# Altium PCB PCB_6050_2022-06-14.pcbdoc
Units mil, origin at the board's own origin, x right, y up, seen from the top; angles counter-clockwise.
Board outline 1180.29 x 1050.29 mil, 2 copper layers (Top Layer, Bottom Layer); 34 components, 23 nets, 128 pads, 23 vias.
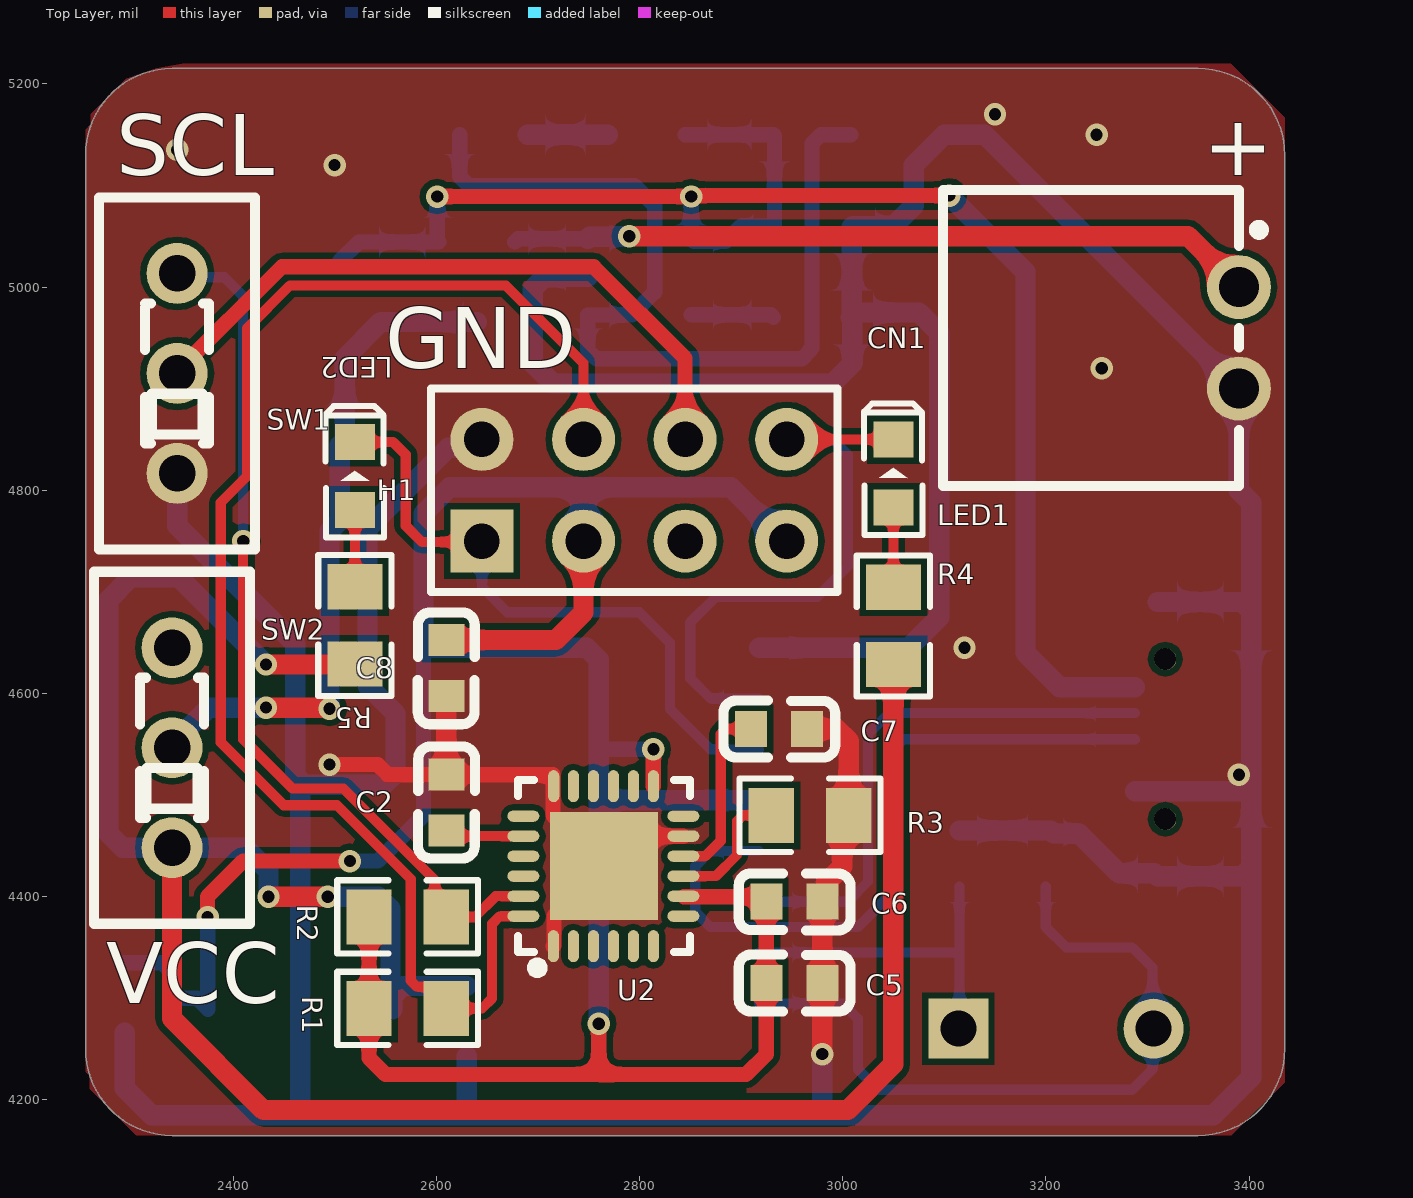
[diagram p0: Top Layer view]
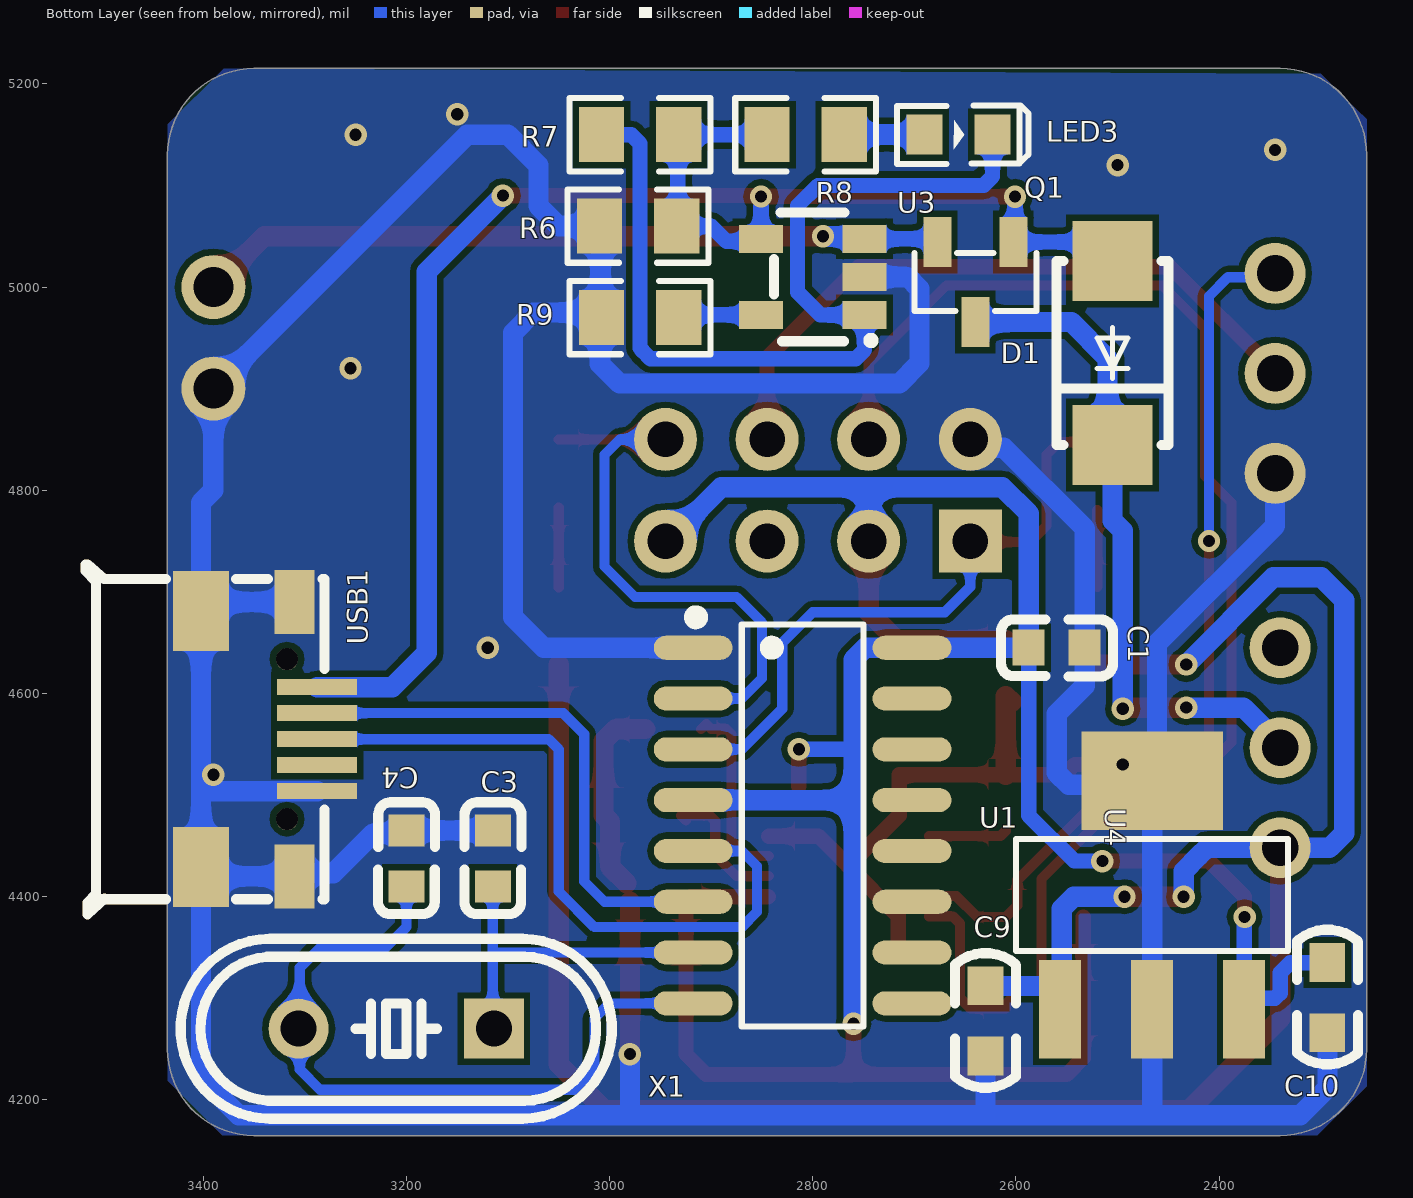
[diagram p1: Bottom Layer view, seen from below]

## Layer stack, top to bottom
Top Solder: solder mask 0.4, Solder Resist, Dk 3.5
Top Layer: signal copper 1.4
Dielectric1: dielectric 12.6, FR-4, Dk 4.8
Bottom Layer: signal copper 1.4
Bottom Solder: solder mask 0.4, Solder Resist, Dk 3.5

## Board outline
2340,4164.85 cw(c2340,4250) 2254.85,4250 2254.85,5130 cw(c2340,5130) 2340,5215.15 3350,5215.15 cw(c3350,5130) 3435.15,5130 3435.15,4250 cw(c3350,4250) 3350,4164.85

## Design rules (kind name [scope] priority, off if disabled: settings)
Clearance [All] p1: gap=6 ignorepadtopadclearanceinfootprint=FALSE
PolygonConnect [All] p1: connectstyle=Direct reliefconductorwidth=10 reliefentries=4 polygonreliefangle="90 Angle" airgapwidth=10
RoutingVias [All] p1: holewidth=12 width=22 viastyle="Through Hole" minholewidth=12 minwidth=22 maxholewidth=12 maxwidth=22
SolderMaskExpansion [All] p1: expansion=4 istentingtop=FALSE
Width [All] p1: maxlimit=50 minlimit=10 preferedwidth=10
30 further rules are at their usual default settings.

## Components (designator, comment, footprint, x,y, rotation, side; value= is the part's Value field where it differs from the comment)
C1 "0.1u" C0603#1 2560,4645 r0 bottom
C2 "10uf" C0603#1 2610,4492.44 r270 top
C3 "22pf" C0603#1 3115,4437.56 r270 bottom
C4 "22pf" C0603#1 3200,4437.56 r270 bottom
C5 "10uf" C0603#1 2952.45,4315 r180 top
C6 "0.1uf" C0603#1 2952.45,4395 r180 top
C7 "0.1uf" C0603#1 2937.45,4565 r180 top
C8 "0.1u" C0603#1 2610,4625 r90 top
C9 "1uf" C0603#2 2629.99,4243.15 r90 bottom
C10 "1uf" C0603#2 2293.47,4266.24 r90 bottom
CN1 "XH-2AW_C2908611" CONN-TH_XH-2AW_C2908611 3390,4950 r270 top
D1 "1N5819(SS14)" DO-214AC_L4.3-W2.7-LS5.3-RD 2505,4935 r90 bottom
H1 "HDR-F-2.54_2x4" HDR-F-2.54_2X4 2795,4800 r0 top
LED1 "LED-0603_R" LED0603_RED 3050,4816.54 r90 top
LED2 "LED-0603_R" LED0603_RED 2520,4813.92 r90 top
LED3 "LED-0603_R" LED0603_RED 2656.53,5150 r180 bottom
Q1 "SI2301DS" SOT-23-3_L2.9-W1.3-P1.90-LS2.4-BR 2640,5005 r90 bottom
R1 "4.7k" R0805 2571.96,4290 r180 top
R2 "4.7k" R0805 2571.96,4380 r180 top
R3 "10k" R0805 2967.93,4480 r180 top
R4 "2k" R0805 3050,4666.54 r270 top
R5 "2k" R0805 2520,4666.96 r270 top
R6 "10k" R0805 2971.96,5060 r0 bottom
R7 "10k" R0805 2970,5150 r180 bottom
R8 "1k" R0805 2806.96,5150 r0 bottom
R9 "1.5k" R0805 2970,4970 r180 bottom
SW1 "拨动开关" SW-TH_SS-12D01-GX 2345,4915 r90 top
SW2 "拨动开关" SW-TH_SS-12D01-GX 2340,4546.58 r90 top
U1 "CH340G" SOIC-16_L9.9-W3.9-P1.27-LS6.0-BL 2810,4470 r270 bottom
U2 "MPU-6050_C24112  六轴陀螺仪" QFN-24_L4.0-W4.0-P0.50-BL-EP2.7 2764.51,4430 r0 top
U3 "LTC4054XES5-4.2#TRPBF" TSOT-23-5_L2.9-W1.6-P0.95-LS2.8-BR 2800,5010 r180 bottom
U4 "TC1262-3.3" tc1262 2450,4385 r270 bottom
USB1 "MICROQTJ usb接口" MICRO-USB-SMD_MICROQTJ 3345,4555 r270 bottom
X1 "12MHZ" HC-49US_L11.5-W4.5-P4.88 3210,4270 r0 bottom

## Footprints (in the part's own frame and the unit in brackets; to place one, negate y for a bottom-side part, rotate by r counter-clockwise, add the part's x,y. Pads: shape width x height; smd on the part's side, far side on the other; paste and mask are expansions set on the pad)
C0603#1 [mm]
  rect 0.8x0.9 smd: 1(-0.7,0) 2(0.7,0)
  silkscreen extent -1.41,-0.71 1.39,0.72
C0603#2 [mm]
  rect 0.965x0.889 smd: 1(0,0) 2(1.753,0)
  silkscreen extent -0.79,-0.76 2.57,0.76, body extent 0.1,-0.4 1.7,0.4, height 0.3
CONN-TH_XH-2AW_C2908611 [mm]
  round 1.6 hole 1: 1(-1.27,0) 2(1.27,0)
  silkscreen extent -3.7,-7.4 3.7,0.6
DO-214AC_L4.3-W2.7-LS5.3-RD [mm]
  rect 2x2 smd: 1(-2.3,0) 2(2.3,0)
  silkscreen extent -2.3,-1.4 2.3,1.4
HC-49US_L11.5-W4.5-P4.88 [mm]
  rect 1.5x1.5 hole 0.9: 1(-2.44,0)
  round 1.5 hole 0.9: 2(2.44,0)
  silkscreen extent -5.39,-2.25 5.39,2.25
HDR-F-2.54_2X4 [mil]
  rect 62x62 hole 35: 1(-150,-50)
  round 62 hole 35: 2(-150,50) 3(-50,-50) 4(-50,50) 5(50,-50) 6(50,50) 7(150,-50) 8(150,50)
  silkscreen extent -200,-100 200,100
LED0603_RED [mm]
  rect 0.9x1 smd: 1(-0.85,0) 2(0.85,0)
  silkscreen extent -1.54,-0.73 1.75,0.73
MICRO-USB-SMD_MICROQTJ [mm]
  rect 0.4x2 smd: 1(-1.3,1.452) 2(-0.65,1.452) 3(0,1.452) 4(0.65,1.452) 5(1.3,1.452)
  rect 1.6x1 smd: 6(-3.429,0.889) 9(3.429,0.889)
  rect 2x1.4 smd: 7(-3.2,-1.452) 8(3.2,-1.452)
  round 0.55 hole 0.55 unplated: ""(-2,0.698) ""(2,0.698)
  silkscreen extent -4.37,-4.34 4.38,1.63
QFN-24_L4.0-W4.0-P0.50-BL-EP2.7 [mm]
  oval 0.28x0.8 smd: 1(-1.25,-2) 2(-0.75,-2) 3(-0.25,-2) 4(0.25,-2) 5(0.75,-2) 6(1.25,-2) 13(1.25,2) 14(0.75,2) 15(0.25,2) 16(-0.25,2) 17(-0.75,2) 18(-1.242,2)
  oval 0.8x0.28 smd: 7(2,-1.25) 8(2,-0.75) 9(2,-0.25) 10(2,0.25) 11(2,0.75) 12(2,1.25) 19(-2,1.25) 20(-2,0.75) 21(-2,0.25) 22(-2,-0.25) 23(-2,-0.75) 24(-2,-1.25)
  rect 2.7x2.7 smd: 25(0.012,0)
  silkscreen extent -2.14,-2.79 2.16,2.15
R0805 [mil]
  rect 44.59x54.21 smd: 1(-38.04,0) 2(38.04,0)
  silkscreen extent -69,-36 69,36
SOIC-16_L9.9-W3.9-P1.27-LS6.0-BL [mil]
  oval 23.7x77.6 smd: 1(-175,-107.7) 2(-125,-107.7) 3(-75,-107.7) 4(-25,-107.7) 5(25,-107.7) 6(75,-107.7) 7(125,-107.7) 8(175,-107.7) 9(175,107.7) 10(125,107.7) 11(75,107.7) 12(25,107.7) 13(-25,107.7) 14(-75,107.7) 15(-125,107.7) 16(-175,107.7)
  silkscreen extent -211,-111 198,60
SOT-23-3_L2.9-W1.3-P1.90-LS2.4-BR [mm]
  rect 1.25x0.7 smd: 1(1,-0.95) 2(1,0.95) 3(-1,0)
  silkscreen extent -0.73,-1.53 0.73,1.53
SW-TH_SS-12D01-GX [mil]
  round 60 hole 36: 1(-98.43,0) 2(-0.01,0) 3(98.42,0)
  silkscreen extent -173,-77 173,77
tc1262 [mm]
  rect 2.465x1.05 smd: 1(2.436,-2.707) 2(2.436,-0.407) 3(2.436,1.893)
  rect 2.465x3.54 smd: 4(-3.279,-0.407)
  silkscreen extent -1.82,-3.81 0.97,2.99
TSOT-23-5_L2.9-W1.6-P0.95-LS2.8-BR [mm]
  rect 1.1x0.7 smd: 1(1.294,-0.951) 2(1.294,-0.001) 3(1.294,0.951) 4(-1.294,0.951) 5(-1.294,-0.949)
  silkscreen extent -0.97,-1.65 1.52,1.61

## Part data
C9 C10: library part 22uf
U4: library part TC1262-3.3VDBTR

## Via types
v1: diameter 22, hole 12, Top Layer to Bottom Layer, tented both sides, 23 vias

## Nets (pads, with @x,y where several pads share a name; then routed paths per layer and width w, separated by ;. In a path a pad name is that pad's centre, name@x,y a point inside that pad or via, vN(x,y) a via of type N, cw(c..) or ccw(c..) an arc to the next point about the centre after c; other vN are vias at no path point)
GND: C1.1 C2.1 C3.1 C4.1 C5.1 C6.1 C7.1 C8.1 C9.1 C10.1 CN1.2 H1.2 R3.1 R6.2 R9.1 SW1.1 U1.1 U2.1 U2.11 U2.18 U2.25 U3.2 U4.2 U4.4 USB1.5 USB1.6 USB1.7 USB1.8 USB1.9 | length 6366
  Top Layer w15: v1(2495,4530) 2542.39,4530 2552.39,4520 C2.1 2715,4520 U2.18@2715,4509.36 ; U2.18@2715.02,4508.14 2715.02,4479.98 U2.25 ; U2.1 2715.98,4351.92 2715.98,4380.98 U2.25 ; U2.11 2794.54,4459.54 U2.25
  Top Layer w20: SW1.1@2340,4811.57 SW1.1 ; C8.1@2604.25,4591.7 C8.1 C2.1 ; C7.1 2994.26,4565 3005.97,4553.28 R3.1 2999.61,4473.64 2999.61,4429.61 2983.34,4413.34 ; v1(2980,4245) C5.1 C6.1
  Bottom Layer w20: C10.1 2293.47,4211.53 2320,4185 2465,4185 ; SW1.1 2345,4765 2461.28,4648.72 2461.28,4518.85 U4.4 ; C9.1 2629.99,4185.01 ; H1.2 2636.96,4841.96 2611.96,4841.96 2532.45,4762.44 C1.1 2532.45,4607.56 2560,4580 2560,4521.72 2548.28,4510 2470.13,4510 U4.4 ; U3.2 2706.72,5009.96 2695,4998.25 2695,4925 2715,4905 2990,4905 3009.61,4924.61 3009.61,4968.43 R9.1 R9.1@3009.02,4970.98 ; U1.1 3065,4645 3095,4675 3095,4955 3075,4975 3013.04,4975 R9.1@3009.02,4970.98 ; v1(2980,4245) 2980,4185 ; C3.1 3204.72,4465.11 3207.72,4462.11 3232.89,4462.11 3272.03,4422.97 3307.03,4422.97 USB1.9 3393.16,4420 USB1.8 ; USB1.5 3400.97,4503.8 3402.18,4505 ; USB1.6 3393.16,4690 USB1.7 ; 2465,4185 2630,4185 ; 2465,4185 2466.04,4186.04 U4.2 U4.4 ; 2630,4185 2980,4185 ; 2980,4185 3365,4185 3402.18,4222.18 USB1.8 ; R9.1@3009.02,4970.98 3009.02,5059.02 R6.2 3050,5060 3070,5080 3070,5120 3100,5150 3140,5150 3149.97,5140.03 CN1.2 3390,4800 3402.18,4787.82 USB1.7 ; USB1.8 3402.18,4505 ; 3402.18,4505 USB1.7
  other v1: 3390,4520 3120,4645 3255,4920 2500,5120 2345,5135 3250,5150 3150,5170
MOS_VCC: D1.1 Q1.3 SW2.2 | length 669.8
  Top Layer w20: v1(2432.43,4586.04) 2493.96,4586.04 v1(2495,4585)
  Bottom Layer w20: SW2.2 2340,4550 2376.04,4586.04 v1(2432.43,4586.04) ; v1(2495,4585) 2495,4760 2505,4770 D1.1 2510,4849.45 2510,4930 2545.63,4965.63 Q1.3
NetC2_2: C2.2 U2.20 | length 78
  Top Layer w10: C2.2 2615.35,4459.54 U2.20
NetC3_2: C3.2 U1.7 X1.1 | length 339.6
  Bottom Layer w10: U1.7 3110.53,4345 3115,4340.53 ; X1.1 3115,4271.06 3115,4340.53 ; C3.2 3115,4340.53
NetC4_2: C4.2 U1.8 X1.2 | length 722.5
  Bottom Layer w10: U1.8 3000,4295 3015,4280 3015,4230 3035,4210 3285,4210 3305,4230 3305,4268.94 X1.2 3305,4271.06 3305,4330 3285,4350 3220,4350 3200,4370 C4.2
NetC7_2: C7.2 U2.10 | length 184.1
  Top Layer w10: U2.10 2864.85,4439.85 2880,4455 2880,4560 2885,4565 2899.89,4565 2904.89,4570 C7.2
NetCN1_1: CN1.1 Q1.2 U3.3 | length 735.6
  Top Layer w20: v1(2790,5050) 3340,5050 CN1.1
  Bottom Layer w15: Q1.2 2680.47,5047.44 U3.3
  Bottom Layer w20: U3.3 2751.24,5049.62 2789.62,5049.62 v1(2790,5050)
NetH1_1: H1.1 LED2.2 U1.3 | length 629.1
  Top Layer w10: LED2.2 2557.62,4847.38 2570,4835 2570,4765 2585.86,4749.14 2644.14,4749.14 H1.1
  Bottom Layer w10: H1.1 2645,4705 2670,4680 2800,4680 2830,4650 2830,4585 2870,4545 U1.3
NetH1_4: H1.4 R1.1 U2.24 | length 1421.3
  Top Layer w10: U2.24 2685.57,4380.6 2662.23,4380.6 2655,4373.37 2655,4300 2645,4290 R1.1 2610,4294.18 2592.71,4311.47 2580.86,4311.47 2575,4317.33 2575,4417.37 2502.37,4490 2450,4490 2388,4552 2388,4788 2414,4814 2414,4959.54 2455.96,5001.5 2668.5,5001.5 2745,4925 H1.4
NetH1_6: H1.6 SW1.2 | length 661.8
  Top Layer w15: SW1.2 2345,4916.7 2448.3,5020 2755,5020 2845,4930 H1.6
NetH1_8: H1.8 LED1.2 U1.2 | length 590
  Top Layer w10: H1.8 LED1.2
  Bottom Layer w10: U1.2 2870,4595 2850,4615 2850,4670 2875,4695 2975,4695 3005,4725 3005,4835 2990,4850 H1.8
NetLED1_1: LED1.1 R4.1 | length 78.5
  Top Layer w10: R4.1 LED1.1
NetLED2_1: LED2.1 R5.1 | length 75.4
  Top Layer w10: R5.1 LED2.1
NetLED3_1: LED3.1 R8.1 | length 78.9
  Bottom Layer w20: LED3.1 R8.1
NetLED3_2: LED3.2 R7.1 U3.1 | length 911.8
  Bottom Layer w15: LED3.2 2623.07,5108.79 2631.86,5100 2795,5100 2815,5080 2815,4995 2792.56,4972.56 U3.1 2749.05,4938.18 2757.84,4929.39 2959.84,4929.39 2967.75,4937.3 2967.75,4937.75 2970,4940 2970,5141.21 2978.79,5150 R7.1
NetR2_1: R2.1 SW1.3 U2.23 | length 884.3
  Top Layer w10: v1(2410,4750) 2410,4555 2458.69,4506.31 2508.69,4506.31 2598.75,4416.25 2598.75,4391.25 R2.1 2638.17,4380 2658.65,4400.48 U2.23
  Bottom Layer w10: SW1.3@2343.15,5011.57 SW1.3 2348.78,5009.64 2391.46,5009.64 2410,4991.1 v1(2410,4750)
NetR3_2: R3.2 U2.9 | length 137.9
  Top Layer w10: U2.9 2875.17,4420.17 2896,4441 2896,4474.14 2901.86,4480 R3.2 R3.2@2924.89,4475
NetR9_2: R9.2 U3.5 | length 82.1
  Bottom Layer w15: U3.5 2929.33,4972.63 R9.2
NetU1_5: U1.5 USB1.3 | length 711.6
  Bottom Layer w10: U1.5 2870,4445 2855,4430 2855,4385 2870,4370 3015,4370 3050,4405 3050,4545 3060,4555 USB1.3
NetU1_6: U1.6 USB1.2 | length 531.9
  Bottom Layer w10: U1.6 3005,4395 3025,4415 3025,4560 3045.6,4580.6 USB1.2
USB_VCC: D1.2 Q1.1 R6.1 R7.2 R8.2 U3.4 USB1.1 | length 1565.7
  Top Layer w15: v1@2601.01,5089.06 v1(2850.94,5089.06) 2851.88,5090 v1(3105,5090)
  Bottom Layer w15: D1.2 2523.82,5044.37 Q1.1 2600.97,5045.99 v1(2600.97,5089.03) ; R8.2 R7.2 2932.94,5149.02 2932.94,5060.98 2931.96,5060 2900,5060 2885,5045 2853.38,5045 U3.4 v1(2850.94,5089.06)
  Bottom Layer w20: v1(3105,5090) 3180,5015 3180,4640 3213.8,4606.2 USB1.1
V3V3: C1.2 C5.2 C6.2 C8.2 C10.2 H1.3 H1.7 R1.2 R2.2 U1.4 U1.16 U2.8 U2.13 U4.3 | length 3039.1
  Top Layer w15: v1(2375,4380) 2375,4400 2410,4435 v1(2515,4435) ; R2.2 R1.2 2533.92,4241.08 2550,4225 2905,4225 2924.89,4244.89 C5.2 C6.2 2920.08,4399.81 U2.8@2843.92,4399.81 ; 2760,4225 v1(2760,4275) ; U2.13 v1(2813.73,4545)
  Top Layer w20: C8.2 2717.55,4652.56 2745,4680 H1.3
  Bottom Layer w15: C10.2 2293.71,4335 2330,4335 2340,4325 2340,4305 2345,4300 2364.58,4300 U4.3@2375.24,4289.33 ; v1(2375,4380) 2375.24,4379.76 U4.3@2375.24,4289.33 ; U4.3 U4.3@2375.24,4289.33 ; v1(2515,4435) 2542.55,4435 2587.55,4480 C1.2 ; 2760,4540 2765,4545 v1(2813.73,4545)
  Bottom Layer w20: H1.3 2745,4803 ; v1(2760,4275) 2760,4495 ; U1.4 2760,4495 ; H1.7 2943,4750 2890,4803 2745,4803 ; 2745,4803 2613.37,4803 2587.55,4777.18 C1.2 U1.16 2702.46,4644.85 2748.28,4644.85 2760,4633.13 2760,4540 2760,4495
VCC: C9.2 R4.2 R5.2 SW2.1 U4.1 | length 2358.3
  Top Layer w20: SW2.1 2340,4280 2430,4190 3005,4190 3050,4235 R4.2 ; v1(2432.5,4628.47) 2519.56,4628.47 R5.2 ; v1(2435,4400) v1(2493.25,4400)
  Bottom Layer w20: v1(2432.5,4628.47) 2346.65,4714.33 2299.45,4714.33 2277.07,4691.95 2277.07,4462.51 2291.43,4448.15 2411.85,4448.15 2419.97,4440.03 2435,4425 v1(2435,4400) ; v1(2493.25,4400) 2543.28,4400 2555,4388.28 2555,4290.68 U4.1 2556.59,4301.48 2567.26,4312.15 C9.2
pads on no net: H1.5 SW2.3 U1.9 U1.10 U1.11 U1.12 U1.13 U1.14 U1.15 U2.2 U2.3 U2.4 U2.5 U2.6 U2.7 U2.12 U2.14 U2.15 U2.16 U2.17 U2.19 U2.21 U2.22 USB1. USB1.4

## Polygon pours and split planes (outlines as drawn)
GND on Top Layer "GND_L01_P000" (solid, remove dead copper, pour order 0): 2325,5215.15 2295,5205 2260,5170 2260,5160 2255,5155 2255,4227.48 2258.87,4223.6 2258.87,4211.13 2305,4165 3382.72,4165 3435,4217.28 3435,5166.83 3381.83,5220 2350,5220
GND on Bottom Layer "GND_L02_P001" (solid, remove dead copper, pour order 1): 2299.98,5209.98 2265,5175 2255,5165 2255,4213.56 2303.56,4165 3381.19,4165 3435,4218.81 3435,5160 3380,5215 3335,5215

## Silkscreen, mask and mechanical layers (free items; w line width, h text height)
Top Overlay:
  text "SCL" at 2285,5110 h60
  text "+" at 3355,5110 h60
  text "GND" at 2550,4920 h60
  text "VCC" at 2275,4295 h60
Bottom Solder:
  the board outline again, w20